# Altium PCB ESP32_Projet.PcbDoc (part 2 of 2)
Units mm, origin at the board's own origin, x right, y up, seen from the top; angles counter-clockwise.
Board outline 70 x 50 mm, 4 copper layers (Top Layer 1, GND, VCC, Bottom Layer 1), stack 1.573 mm thick; 93 components, 75 nets, 367 pads, 172 vias.
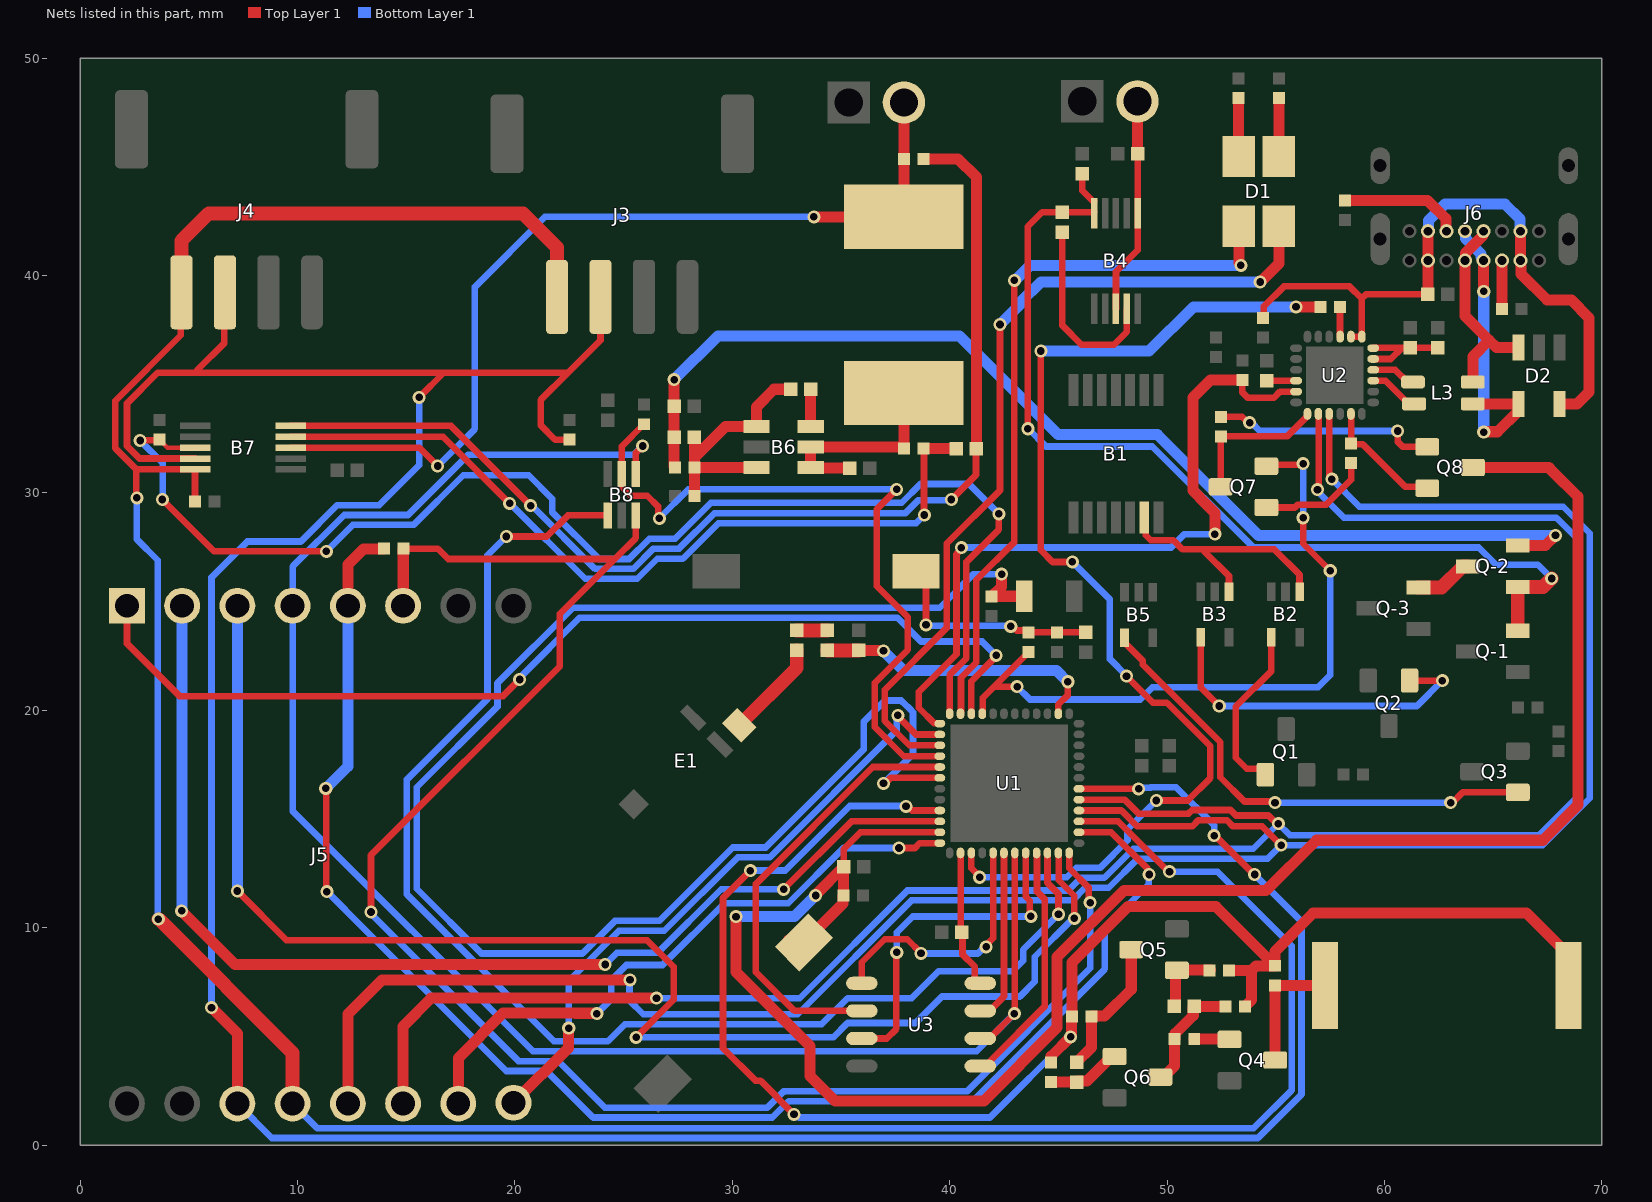
[diagram p4: the nets of this part, all layers, seen from the top]

## Via types
v1: diameter 0.6, hole 0.35, Top Layer 1 to Bottom Layer 1, 143 vias
v2: diameter 0.5, hole 0.2, Top Layer 1 to Bottom Layer 1, 29 vias

## Nets (pads, with @x,y where several pads share a name; then routed paths per layer and width w, separated by ;. In a path a pad name is that pad's centre, name@x,y a point inside that pad or via, vN(x,y) a via of type N, cw(c..) or ccw(c..) an arc to the next point about the centre after c; other vN are vias at no path point) (continued)
NetB1_6: B1.6 B2.1 B3.1 | length 11.9
  Top Layer 1 w0.305: B1.6@48.95,28.863 49.023,28.79 49.023,28.05 49.25,27.823 50.292,27.823 50.716,27.399 51.758,27.399 ; B3.1@52.847,25.459 52.847,26.172 51.689,27.33 51.758,27.399 ; B2.1@56.098,25.459 56.09,25.468 56.09,26.24 54.93,27.399 51.758,27.399
NetB2_4: B2.4 Q1.1 | length 7.9
  Top Layer 1 w0.305: Q1.1@54.524,17.035 54.524,17.062 54.276,17.309 53.666,17.309 53.162,17.814 53.162,20.168 54.798,21.804 B2.4@54.798,23.359
NetB3_4: B3.4 Q2.1 | length 15.8
  Top Layer 1 w0.305: B3.4@51.547,23.359 51.547,21.046 v1(52.4,20.193) ; Q2.1@61.157,21.37 61.174,21.353 62.653,21.353 v1(62.662,21.361)
  Bottom Layer 1 w0.305: v1(52.4,20.193) 61.493,20.193 v1(62.662,21.361)
NetB4_1: B4.1 B4.8 C2.1 J1.2 | length 10
  Top Layer 1 w0.305: B4.8@47.65,38.465 47.65,40.167 48.65,41.167 B4.1@48.65,42.865 48.648,42.868 48.648,45.589 C2.1@48.642,45.594
  Top Layer 1 w0.508: J1.2@48.641,48.006 J1.2@48.641,48.006 C2.1@48.642,45.594
NetB4_5: B4.5 C1.1 L1.2 Q-1.2 Q-2.1 | length 44.8
  Top Layer 1 w0.305: v1(43.594,32.948) 43.594,42.247 44.252,42.906 L1.2@45.187,42.906 45.996,42.906 46.648,42.906 B4.5@46.65,42.903 ; C1.1@46.101,44.676 46.101,43.909 46.597,43.413 B4.5@46.648,43.413
  Top Layer 1 w0.635: Q-1.2@66.132,23.658 Q-2.1@66.132,25.669 67.3,25.669 v1(67.691,26.06)
  Bottom Layer 1 w0.305: v1(43.594,32.948) 43.617,32.948 44.432,32.133 49.319,32.133 53.969,27.483 64.338,27.483 65.126,26.695 67.056,26.695 v1(67.691,26.06)
NetB4_9: B4.9 L1.1 | length 8.9
  Top Layer 1 w0.305: L1.1@45.187,41.986 45.187,37.694 46.076,36.805 47.549,36.805 48.148,37.404 48.148,38.463 B4.9@48.15,38.465
NetB5_4: B5.4 Q3.1 | length 22.6
  Top Layer 1 w0.305: B5.4@48.042,23.334 48.042,23.109 48.887,22.264 48.887,22.094 52.449,18.533 52.449,16.919 53.563,15.804 54.909,15.804 v1(54.966,15.748) ; v1(63.043,15.748) 63.123,15.748 63.595,16.22 Q3.1@66.133,16.22
  Bottom Layer 1 w0.305: v1(54.966,15.748) v1(63.043,15.748)
NetB6_1: B6.1 B6.3 C5.1 L2.1 R7.2 R9.1 | length 11.8
  Top Layer 1 w0.508: L2.1@28.245,32.563 28.254,32.554 28.254,31.621 ; R9.1@28.263,29.845 R7.2@28.263,31.166 ; B6.3@31.11,31.156 31.104,31.161 28.268,31.161 R7.2@28.263,31.166 ; C5.1@32.687,34.773 32.639,34.773 32.631,34.765 31.92,34.765 31.11,33.954 B6.1@31.11,33.056 29.698,33.056 28.263,31.621 R7.2@28.263,31.166
NetB6_4: B6.4 B6.5 C4.1 R6.1 X1.2 | length 9.6
  Top Layer 1 w0.508: C4.1@35.405,31.14 35.397,31.148 33.617,31.148 B6.4@33.61,31.156 B6.5@33.61,32.106 37.828,32.106 R6.1@37.904,32.029 37.904,34.59 X1.2@37.897,34.597
NetB6_6: B6.6 C5.2 | length 1.7
  Top Layer 1 w0.508: C5.2@33.607,34.773 33.608,34.771 33.608,33.057 B6.6@33.61,33.056
NetB7_3: B7.3 R23.2 U1.12 | length 60.9
  Top Layer 1 w0.203: R23.2@3.659,32.441 3.831,32.27 3.833,32.27 4.025,32.077 B7.3@5.297,32.077
  Top Layer 1 w0.305: v1(2.761,32.406) 2.78,32.424 3.639,32.424 R23.2@3.658,32.443 ; v1(3.785,29.693) 6.172,27.305 v1(11.328,27.305) ; U1.12@39.998,19.837 39.998,21.617 40.769,22.388 40.769,26.825 42.266,28.321 v1(42.266,29.032)
  Bottom Layer 1 w0.305: v1(2.761,32.406) 3.81,31.357 3.81,29.718 v1(3.785,29.693) ; v1(11.328,27.305) 12.548,28.524 15.342,28.524 17.628,30.81 20.639,30.81 21.717,29.732 21.717,29.12 23.88,26.957 25.255,26.957 26.187,27.889 27.365,27.889 29.016,29.54 37.795,29.54 38.659,30.404 40.894,30.404 v1(42.266,29.032)
NetB7_4: B7.4 J3.3 J4.3 J5.14 R21.2 U1.42 | length 151.7
  Top Layer 1 w0.305: B7.4@5.297,31.577 2.738,31.577 2.159,32.156 2.159,34.112 3.571,35.524 5.497,35.524 ; J4.3@6.668,39.224 6.638,39.194 6.638,36.889 5.385,35.636 5.497,35.524 ; v1(15.596,34.392) 16.728,35.524 ; R21.2@22.504,32.443 21.855,32.443 21.184,33.114 21.184,34.265 22.443,35.524 ; J3.3@23.94,39.014 23.94,37.021 22.443,35.524 ; U1.42@45.948,16.387 45.95,16.385 48.69,16.385 v1(48.692,16.383) ; v1(52.163,14.233) 52.205,14.233 53.992,12.446 v1(54.026,12.446) ; 5.497,35.524 16.728,35.524 ; 16.728,35.524 22.443,35.524
  Top Layer 1 w0.508: v1(6.045,6.325) 7.239,5.131 J5.14@7.239,1.905
  Bottom Layer 1 w0.305: v1(6.045,6.325) 6.045,26.111 7.696,27.762 10.16,27.762 11.832,29.434 13.762,29.434 15.596,31.267 v1(15.596,34.392) ; J5.14@7.239,1.905 8.821,0.323 54.179,0.323 56.185,2.329 56.185,10.287 v1(54.026,12.446) ; v1(48.692,16.383) 48.748,16.439 49.243,16.439 49.255,16.452 50.426,16.452 52.163,14.715 v1(52.163,14.233)
NetB7_5: B7.5 J3.4 J4.4 J5.13 R22.2 U1.39 | length 135.2
  Top Layer 1 w0.305: v1(2.616,29.769) 2.595,29.79 2.595,31.077 ; J4.4@4.668,39.224 4.631,39.187 4.631,37.245 1.626,34.239 1.626,32.047 2.595,31.077 ; R22.2@5.29,29.591 5.29,31.075 B7.5@5.293,31.077 ; B7.5@5.297,31.077 B7.5@5.293,31.077 ; U1.39@45.948,14.887 47.758,14.887 50.072,12.573 v1(50.114,12.573) ; 2.595,31.077 B7.5@5.293,31.077
  Top Layer 1 w0.635: v1(3.607,10.389) 3.632,10.389 9.779,4.242 J5.13@9.779,1.905 ; J4.4@4.668,39.224 4.668,41.6 5.918,42.85 20.381,42.85 21.94,41.29 J3.4@21.94,39.014
  Bottom Layer 1 w0.305: v1(2.616,29.769) 2.616,27.858 3.572,26.903 3.572,10.424 v1(3.607,10.389) ; J5.13@9.779,1.905 10.906,0.778 53.991,0.778 55.73,2.517 55.73,9.167 52.324,12.573 v1(50.114,12.573)
NetB7_8: B7.8 J2.2 R5.1 X1.1 | length 42.4
  Top Layer 1 w0.305: B7.8@9.697,32.077 15.61,32.077 v1(16.452,31.235)
  Top Layer 1 w0.508: v1(33.757,42.697) X1.1@37.897,42.697 37.904,42.705 R5.1@37.904,45.364 37.9,45.368 37.9,47.952 J2.2@37.897,47.955 J2.2@37.888,47.946
  Bottom Layer 1 w0.305: v1(16.452,31.235) 18.161,32.944 18.161,39.472 21.387,42.697 v1(33.757,42.697)
NetB7_9: B7.9 C3.2 R6.2 | length 37.6
  Top Layer 1 w0.305: B7.9@9.697,32.577 16.699,32.577 v1(19.761,29.515) ; R6.2@38.804,32.029 38.82,32.013 38.82,28.998 v1(38.837,28.981)
  Top Layer 1 w0.508: R6.2@38.804,32.029 C3.2@40.307,32.029
  Bottom Layer 1 w0.305: v1(19.761,29.515) 19.773,29.515 23.241,26.047 25.632,26.047 26.552,26.968 27.73,26.968 29.362,28.6 38.456,28.6 v1(38.837,28.981)
NetB7_10: B7.10 C3.1 R5.2 | length 52.5
  Top Layer 1 w0.305: B7.10@9.697,33.077 17.062,33.077 v1(20.726,29.413) ; v1(40.081,29.693) 41.213,30.824 41.213,32.015 C3.1@41.227,32.029
  Top Layer 1 w0.508: R5.2@38.804,45.364 40.386,45.364 41.227,44.523 C3.1@41.227,32.029
  Bottom Layer 1 w0.305: v1(20.726,29.413) 20.781,29.413 23.692,26.502 25.443,26.502 26.376,27.434 27.553,27.434 29.174,29.055 37.953,29.055 38.565,29.667 40.056,29.667 v1(40.081,29.693)
NetB8_1: B8.1 U1.34 | length 61.9
  Top Layer 1 w0.305: v1(19.609,27.991) 21.469,27.991 22.439,28.961 B8.1@24.267,28.961 ; U1.34@44.498,13.437 44.498,12.059 45.009,11.549 v1(45.009,10.617)
  Bottom Layer 1 w0.305: v1(19.609,27.991) 18.745,27.127 18.745,20.523 15.037,16.815 15.037,11.532 21.796,4.773 24.28,4.773 25.063,5.555 34.105,5.555 35.306,6.756 38.252,6.756 39.497,8.001 42.901,8.001 43.383,8.484 43.383,8.992 v1(45.009,10.617)
NetB8_3: B8.3 J5.6 R26.1 U1.36 | length 81
  Top Layer 1 w0.305: v1(13.386,10.719) 13.386,13.335 22.073,22.022 22.073,24.435 24.594,26.957 ; R26.1@14.868,27.423 R26.1@14.877,27.432 16.459,27.432 16.935,26.957 24.594,26.957 ; B8.3@25.567,28.961 25.567,27.93 24.594,26.957 ; U1.36@45.498,13.437 45.498,12.73 46.402,11.826 46.402,11.205 v1(46.459,11.148)
  Top Layer 1 w0.508: J5.6@14.859,24.805 14.868,24.814 R26.1@14.868,27.423
  Bottom Layer 1 w0.305: v1(13.386,10.719) 13.386,10.639 20.162,3.863 21.994,3.863 24.137,1.72 31.616,1.72 32.36,2.464 32.398,2.464 32.404,2.47 40.799,2.47 46.459,8.13 v1(46.459,11.148)
NetB8_4: B8.4 J5.4 U1.31 U3.6 | length 79
  Top Layer 1 w0.305: B8.4@25.567,30.861 25.567,31.841 v1(25.883,32.156) ; U3.6@41.409,4.902 41.834,4.902 42.998,6.066 U1.31@42.998,13.437
  Bottom Layer 1 w0.305: v1(25.883,32.156) 25.483,31.757 17.863,31.757 15.085,28.979 12.15,28.979 9.779,26.608 J5.4@9.779,24.805 9.779,15.367 20.828,4.318 41.25,4.318 v1@42.955,6.024
  other v1: 42.977,6.045
NetB8_5: B8.5 R24.1 U1.16 | length 33.4
  Top Layer 1 w0.305: R24.1@25.933,33.154 24.917,32.138 B8.5@24.917,30.861 24.965,30.813 24.965,30.236 25.337,29.863 26.094,29.863 26.588,29.369 26.588,28.885 v1(26.645,28.829) ; v1(37.562,30.159) 36.652,29.249 36.652,25.705 38.075,24.282 38.075,22.776 36.56,21.261 36.56,19.218 37.891,17.887 U1.16@39.548,17.887
  Bottom Layer 1 w0.305: v1(26.645,28.829) 27.975,30.159 v1(37.562,30.159)
NetB9_1: B9.1 R25.2 U1.18 | length 75.4
  Top Layer 1 w0.305: v1(36.957,16.637) 37.037,16.637 37.287,16.887 U1.18@39.548,16.887 ; B9.1@43.387,25.298 B9.1@43.438,25.248
  Top Layer 1 w0.508: v1(42.393,26.264) 42.375,26.246 42.375,25.68 R25.2@41.935,25.24 41.939,25.244 43.434,25.244 B9.1@43.438,25.248
  Bottom Layer 1 w0.305: v1(36.957,16.637) 38.312,17.992 38.312,19.905 38.22,19.997 38.22,20.011 37.867,20.364 37.853,20.364 37.77,20.447 37.033,20.447 36.043,19.456 36.043,18.195 31.536,13.688 30.023,13.688 26.645,10.31 24.602,10.31 23.106,8.814 18.466,8.814 15.492,11.788 15.492,16.459 19.2,20.168 19.2,21.246 22.668,24.714 39.548,24.714 41.097,26.264 v1(42.393,26.264)
NetBOOT1_2: BOOT1.2 C12.1 Q8.3 R11.1 U1.23 | length 87.5
  Top Layer 1 w0.305: C12.1@35.125,12.802 35.125,13.612 35.901,14.387 U1.23@39.548,14.387
  Top Layer 1 w0.508: v1(30.175,10.505) 30.173,10.502 30.173,7.953 33.576,4.549 33.576,3.177 34.722,2.032 41.58,2.032 44.947,5.399 44.947,8.641 48.015,11.709 54.559,11.709 56.871,14.021 67.285,14.021 68.91,15.646 68.91,29.82 67.716,31.014 67.564,31.166 Q8.3@64.067,31.166 ; BOOT1.2@32.586,9.421 BOOT1.2@32.698,9.421 ; BOOT1.2@33.297,9.32 35.089,11.111 35.089,11.46 R11.1@35.11,11.481 35.118,11.488 35.118,12.794 C12.1@35.125,12.802 33.85,11.527 33.85,11.498 v1(33.833,11.481)
  Bottom Layer 1 w0.508: v1(30.175,10.505) 32.857,10.505 v1(33.833,11.481)
NetC6_1: C6.1 L2.2 Q-2.2 R7.1 | length 51.2
  Top Layer 1 w0.508: v1(27.33,35.204) 27.329,35.203 27.329,33.987 C6.1@27.328,33.985 27.326,33.984 27.326,32.564 L2.2@27.325,32.563 27.325,31.204 R7.1@27.363,31.166 ; Q-2.2@66.132,27.569 67.396,27.569 v1(67.869,28.042)
  Bottom Layer 1 w0.508: v1(27.33,35.204) 29.337,37.211 40.462,37.211 44.983,32.69 49.549,32.69 54.197,28.042 v1(67.869,28.042)
NetC7_1: C7.1 E1.3 | length 4.5
  Top Layer 1 w0.635: E1.3@30.324,19.308 32.971,21.954 C7.1@32.971,22.751
NetC7_2: C7.2 C8.1 | length 1.4
  Top Layer 1 w0.508: C7.2@32.971,23.671 C7.2@32.972,23.673 ; C8.1@34.366,23.673 C8.1@34.368,23.674
  Top Layer 1 w0.635: C7.2@32.971,23.671 34.365,23.671 C8.1@34.368,23.674
NetC8_2: C8.2 C9.2 U1.2 | length 13.3
  Top Layer 1 w0.305: U1.2@44.998,19.837 44.998,20.259 45.441,20.701 v1(45.441,21.311)
  Top Layer 1 w0.508: C9.2@35.815,22.751 35.825,22.742 36.948,22.742 v1(36.957,22.733)
  Top Layer 1 w0.635: C8.2@34.368,22.754 35.813,22.754 C9.2@35.815,22.751
  Bottom Layer 1 w0.508: v1(36.957,22.733) 37.871,21.819 44.908,21.819 45.416,21.311 v1(45.441,21.311)
NetC13_1: C13.1 R10.1 R12.1 RESET1.2 | length 10.1
  Top Layer 1 w0.305: RESET1.2@38.453,26.391 38.913,25.931 v1(38.913,23.927) ; v1(42.81,23.862) 42.89,23.862 43.084,23.669 43.551,23.669 R12.1@43.637,23.582 R10.1@44.933,23.582 44.938,23.587 46.248,23.587 C13.1@46.253,23.592
  Bottom Layer 1 w0.305: v1(38.913,23.927) 38.945,23.894 42.778,23.894 v1(42.81,23.862)
NetC14_1: C14.1 Q5.3 R13.1 | length 6.6
  Top Layer 1 w0.508: C14.1@45.847,3.813 46.526,4.491 R13.1@46.526,5.918 46.536,5.928 47.127,5.928 48.353,7.154 Q5.3@48.353,8.992
NetC14_2: C14.2 Q6.1 R14.1 | length 3.4
  Top Layer 1 w0.508: R14.1@44.653,2.903 44.658,2.898 45.842,2.898 C14.2@45.847,2.893 45.903,2.949 46.316,2.949 47.441,4.074 Q6.1@47.591,4.074 ; Q6.1@47.583,4.082 Q6.1@47.591,4.074 ; Q6.1@47.587,4.078 Q6.1@47.591,4.074
NetC15_1: C15.1 Q5.1 R15.1 | length 3.3
  Top Layer 1 w0.508: C15.1@50.341,6.377 C15.1@50.34,6.375 50.396,6.431 50.396,7.985 Q5.1@50.453,8.042 51.96,8.042 51.976,8.026 R15.1@51.996,8.047
NetC15_2: C15.2 Q6.3 R16.1 R20.1 | length 5.4
  Top Layer 1 w0.508: Q6.3@49.691,3.124 49.841,3.124 50.35,3.633 R20.1@50.35,4.877 50.371,4.898 50.371,5.119 51.204,5.952 51.204,6.319 C15.2@51.26,6.375 R16.1@52.687,6.375
NetC18_1: C18.1 C19.1 U2.5 U2.6 | length 4.5
  Top Layer 1 w0.305: U2.5@59.484,36.158 60.291,36.158 60.8,36.666 ; U2.6@59.484,36.658 59.492,36.666 60.8,36.666 ; C19.1@62.459,36.675 C18.1@61.189,36.675 61.18,36.666 60.8,36.666
NetC21_1: C21.1 U2.16 | length 1.4
  Top Layer 1 w0.305: C21.1@54.585,35.151 54.588,35.154 55.93,35.154 U2.16@55.934,35.158
NetC?_1: C22.1 U1.26 U3.8 | length 6.4
  Top Layer 1 w0.305: U1.26@40.494,13.433 U1.26@40.498,13.437 40.507,13.428 40.507,9.864 40.592,9.779 40.592,8.768 41.16,8.199 41.16,7.579 41.297,7.442 U3.8@41.409,7.442
NetD1_1: D1.1 U1.11 | length 33.5
  Top Layer 1 w0.305: U1.11@40.498,19.837 40.498,19.924 40.521,19.947 40.521,21.496 41.224,22.2 41.224,25.984 42.977,27.737 v1(42.977,39.776)
  Top Layer 1 w0.508: D1.1@53.293,42.266 53.304,42.255 53.304,40.574 53.391,40.487 v1(53.391,40.462)
  Bottom Layer 1 w0.508: v1(42.977,39.776) 43.002,39.776 43.687,40.462 v1(53.391,40.462)
NetD1_2: D1.2 R19.2 | length 2.7
  Top Layer 1 w0.508: D1.2@53.289,45.47 R19.2@53.289,48.166
NetD1_3: D1.3 U1.15 | length 39.2
  Top Layer 1 w0.305: U1.15@39.548,18.387 38.14,18.387 37.015,19.512 37.015,20.938 39.86,23.783 39.86,27.656 42.316,30.113 v1(42.316,37.744)
  Top Layer 1 w0.508: v1(54.28,39.7) 54.302,39.7 55.156,40.554 D1.3@55.156,42.253
  Bottom Layer 1 w0.508: v1(42.316,37.744) 43.265,38.693 43.265,38.769 44.196,39.7 v1(54.28,39.7)
NetD1_4: D1.4 R17.2 | length 2.7
  Top Layer 1 w0.508: D1.4@55.143,45.466 R17.2@55.143,48.166
NetD2_3: D2.3 J6.A7 J6.B7 L3.2 | length 9.5
  Top Layer 1 w0.508: L3.2@64.063,35.095 64.063,36.271 64.81,37.019 ; J6.B7@64.555,41.999 64.528,41.971 64.528,41.829 63.732,41.033 63.732,40.714 J6.A7@63.705,40.687 63.705,38.124 64.81,37.019 ; D2.3@66.157,36.682 65.146,36.682 64.81,37.019
NetD2_4: D2.4 J6.A6 J6.B6 L3.3 | length 14
  Top Layer 1 w0.508: L3.3@64.063,34.095 64.069,34.089 66.151,34.089 D2.4@66.157,34.082 66.157,33.757 65.209,32.809 64.584,32.809 v1(64.567,32.791) ; J6.A6@64.555,40.687 64.561,40.681 64.561,39.274 v1(64.567,39.268)
  Bottom Layer 1 w0.508: J6.B6@63.705,42.037 63.732,42.01 63.732,41.691 64.434,40.989 64.434,40.846 64.555,40.725 J6.A6@64.555,40.687 ; v1(64.567,32.791) v1(64.567,39.268)
NetJ5_1: J5.1 U1.10 | length 48.1
  Top Layer 1 w0.305: J5.1@2.159,24.805 2.159,23.063 4.572,20.65 19.456,20.65 v1(20.218,21.412) ; U1.10@40.998,19.837 40.998,21.33 42.137,22.469 v1(42.137,22.523)
  Bottom Layer 1 w0.305: v1(20.218,21.412) 20.218,21.488 22.989,24.259 37.59,24.259 38.684,23.165 41.495,23.165 v1(42.137,22.523)
NetJ5_2: J5.2 U1.22 | length 52.7
  Top Layer 1 w0.305: v1(32.365,11.765) 35.487,14.887 U1.22@39.548,14.887
  Top Layer 1 w0.508: v1(4.674,10.77) 7.137,8.306 v1(24.155,8.306)
  Bottom Layer 1 w0.305: v1(24.155,8.306) 24.689,8.839 26.568,8.839 29.494,11.765 v1(32.365,11.765)
  Bottom Layer 1 w0.508: v1(4.674,10.77) 4.686,10.782 4.686,24.792 J5.2@4.699,24.805
NetJ5_3: J5.3 U1.35 | length 65
  Top Layer 1 w0.305: v1(7.239,11.684) 9.5,9.423 26.086,9.423 27.305,8.204 27.305,6.68 v1(25.578,4.953) ; U1.35@44.998,13.437 44.998,13.35 45.021,13.327 45.021,12.18 45.735,11.466 v1(45.735,10.425)
  Bottom Layer 1 w0.305: v1(25.578,4.953) 34.646,4.953 35.306,5.613 38.43,5.613 39.649,6.833 43.231,6.833 43.917,7.518 43.917,8.661 45.68,10.425 v1(45.735,10.425)
  Bottom Layer 1 w0.508: v1(7.239,11.684) J5.3@7.239,24.805
NetJ5_5: J5.5 R26.2 U1.38 | length 69.7
  Top Layer 1 w0.305: v1(11.303,16.408) 11.328,16.383 11.328,11.684 v1(11.354,11.659) ; U1.38@45.948,14.387 47.425,14.387 49.118,12.694 49.118,12.502 v1(49.174,12.446)
  Top Layer 1 w0.508: J5.5@12.319,24.805 12.319,26.695 13.035,27.411 13.956,27.411 R26.2@13.977,27.432
  Bottom Layer 1 w0.305: v1(11.354,11.659) 13.074,9.939 19.604,3.408 21.458,3.408 23.601,1.265 31.843,1.265 32.593,2.015 41.055,2.015 47.142,8.103 47.142,9.982 49.16,11.999 49.16,12.431 v1(49.174,12.446)
  Bottom Layer 1 w0.508: v1(11.303,16.408) 12.319,17.424 J5.5@12.319,24.805
NetJ5_9: J5.9 U1.14 | length 29.5
  Top Layer 1 w0.305: v1(37.617,19.761) 37.617,19.719 38.449,18.887 U1.14@39.548,18.887
  Top Layer 1 w0.508: J5.9@19.939,1.945 19.939,1.95 22.461,4.473 22.461,5.358 v1(22.479,5.375)
  Bottom Layer 1 w0.305: v1(22.479,5.375) 22.479,7.544 24.79,9.855 26.873,9.855 30.251,13.233 31.725,13.233 37.561,19.07 37.561,19.705 v1(37.617,19.761)
NetJ5_10: J5.10 U1.24 | length 28.9
  Top Layer 1 w0.305: v1(37.668,13.665) 38.405,13.665 38.627,13.887 U1.24@39.548,13.887
  Top Layer 1 w0.508: J5.10@17.399,1.905 17.399,4.013 19.465,6.079 22.771,6.079 22.787,6.063 23.757,6.063 v1(23.774,6.045)
  Bottom Layer 1 w0.305: v1(23.774,6.045) 24.44,6.711 24.44,7.588 25.132,8.28 26.797,8.28 29.642,11.125 32.577,11.125 35.117,13.665 v1(37.668,13.665)
NetJ5_11: J5.11 U1.41 U2.20 | length 100.5
  Top Layer 1 w0.305: U1.41@45.948,15.887 48.045,15.887 48.685,15.247 50.993,15.247 51.159,15.413 52.921,15.413 53.173,15.161 54.66,15.161 55.038,14.783 v1(55.118,14.783) ; v1(56.921,30.15) 56.977,30.205 56.977,33.482 56.967,33.492 56.967,33.605 U2.20@56.977,33.614
  Top Layer 1 w0.508: J5.11@14.859,1.905 14.859,5.461 16.154,6.756 v1(26.518,6.756)
  Bottom Layer 1 w0.305: v1(26.518,6.756) 33.105,6.756 38.058,11.709 45.458,11.709 46.042,12.294 47.117,12.294 48.454,13.63 53.965,13.63 v1(55.118,14.783) 55.654,14.247 67.096,14.247 68.989,16.14 68.989,27.774 67.908,28.854 58.141,28.854 56.921,30.074 v1(56.921,30.15)
NetJ5_12: J5.12 U1.40 U2.21 | length 105.6
  Top Layer 1 w0.305: U1.40@45.948,15.387 47.902,15.387 48.63,14.658 51.158,14.658 51.447,14.947 52.744,14.947 53.033,14.658 54.379,14.658 v1(55.245,13.792) ; U2.21@57.457,33.631 57.457,30.835 57.579,30.712 v1(57.579,30.632)
  Top Layer 1 w0.508: J5.12@12.319,1.905 12.319,6.02 13.894,7.595 v1(25.298,7.595)
  Bottom Layer 1 w0.305: v1(25.298,7.595) 25.273,7.569 25.273,6.655 25.908,6.02 33.012,6.02 38.244,11.252 45.644,11.252 46.228,11.836 47.32,11.836 48.659,13.175 54.628,13.175 v1(55.245,13.792) 67.285,13.792 69.444,15.951 69.444,28.143 68.224,29.362 58.849,29.362 v1(57.579,30.632)
NetJ6_A5: J6.A5 R30.1 | length 2.2
  Top Layer 1 w0.508: J6.A5@65.405,40.687 65.409,40.683 65.409,38.459 R30.1@65.412,38.456
NetJ6_B5: J6.B5 R29.1 | length 5.6
  Top Layer 1 w0.508: R29.1@58.191,43.452 61.983,43.452 62.828,42.608 62.828,42.064 J6.B5@62.855,42.037
NetL3_1: L3.1 U2.4 | length 2.1
  Top Layer 1 w0.305: U2.4@59.484,35.658 60.5,35.658 61.063,35.095 L3.1@61.313,35.095
NetL3_4: L3.4 U2.3 | length 2.3
  Top Layer 1 w0.305: U2.3@59.484,35.158 60.05,35.158 61.113,34.095 L3.4@61.363,34.095
NetLS1_N: LS1.N Q4.3 R18.1 | length 5.7
  Top Layer 1 w0.508: Q4.3@54.974,3.912 54.97,3.916 54.97,7.344 R18.1@54.966,7.348 57.258,7.348 LS1.N@57.265,7.341
NetLS1_P: LS1.P R13.2 R14.2 R15.2 R16.2 R18.2 U1.21 | length 75.2
  Top Layer 1 w0.305: v1(30.833,12.626) 29.573,11.366 29.573,4.456 31.066,2.963 31.292,2.963 v1(32.842,1.413) ; v1(37.993,15.581) 38.073,15.581 38.267,15.387 U1.21@39.548,15.387
  Top Layer 1 w0.508: R14.2@44.653,3.803 44.674,3.824 44.674,4.085 v1(45.568,4.978) 45.568,5.003 45.605,5.04 45.605,5.897 R13.2@45.626,5.918 45.626,8.389 48.209,10.973 52.241,10.973 R18.2@54.966,8.248 ; R15.2@52.85,8.026 53.88,8.026 ; R16.2@53.587,6.375 53.88,6.669 53.88,8.026 ; LS1.P@68.465,7.341 68.465,8.741 66.538,10.668 56.725,10.668 54.966,8.908 R18.2@54.966,8.248 ; 53.88,8.026 53.887,8.026 54.088,8.227 54.945,8.227 R18.2@54.966,8.248
  Bottom Layer 1 w0.305: v1(30.833,12.626) 32.438,12.626 35.408,15.596 37.978,15.596 v1(37.993,15.581) ; v1(32.842,1.413) 32.922,1.413 33.07,1.265 41.854,1.265 v1(45.568,4.978)
NetQ4_1: Q4.1 R20.2 | length 1.6
  Top Layer 1 w0.508: R20.2@51.25,4.877 51.258,4.869 52.867,4.869 Q4.1@52.874,4.862
NetQ7_1: Q7.1 R31.2 | length 5.2
  Top Layer 1 w0.305: Q7.1@54.568,29.327 55.881,29.327 56.011,29.457 57.321,29.457 58.471,30.607 R31.2@58.471,31.376
NetQ7_2: Q7.2 R12.2 U1.9 | length 31.9
  Top Layer 1 w0.305: U1.9@41.498,19.837 41.498,19.924 41.521,19.947 41.521,20.566 42.037,21.082 ; v1(43.104,21.082) 42.037,21.082 ; R12.2@43.637,22.682 42.037,21.082 ; Q7.2@54.568,31.227 54.628,31.287 56.205,31.287 v1(56.261,31.344) ; v1(56.261,28.854) 56.261,27.661 v1(57.506,26.416)
  Bottom Layer 1 w0.305: v1(43.104,21.082) 43.692,20.494 48.764,20.494 49.327,21.057 56.947,21.057 57.506,21.615 v1(57.506,26.416) ; v1(56.261,28.854) v1(56.261,31.344)
NetQ7_3: Q7.3 R32.1 U2.19 | length 6.8
  Top Layer 1 w0.305: Q7.3@52.468,30.277 52.472,30.281 52.472,32.591 R32.1@52.476,32.595 55.522,32.595 56.459,33.533 U2.19@56.459,33.633 U2.19@56.461,33.63
NetQ8_1: Q8.1 R32.2 | length 10.3
  Top Layer 1 w0.305: R32.2@52.476,33.495 52.595,33.495 52.599,33.499 53.449,33.499 53.717,33.23 v1(53.797,33.23) ; v1(60.604,32.842) 60.604,32.36 60.848,32.116 Q8.1@61.967,32.116
  Bottom Layer 1 w0.305: v1(53.797,33.23) 53.877,33.23 54.265,32.842 v1(60.604,32.842)
NetQ8_2: Q8.2 R31.1 U2.23 | length 5.7
  Top Layer 1 w0.305: U2.23@58.459,33.633 58.465,33.627 58.465,32.282 58.519,32.228 59.009,32.228 60.961,30.276 61.907,30.276 Q8.2@61.967,30.216
"NetQ -2_3": Q-2.3 Q-3.2 | length 2.7
  Top Layer 1 w0.635: Q-3.2@61.56,25.639 62.626,25.639 63.599,26.612 63.824,26.612 Q-2.3@63.832,26.619
NetR27_1: R27.1 U1.27 | length 51.6
  Top Layer 1 w0.305: U1.27@40.998,13.437 40.998,12.73 41.377,12.351 v1(41.377,12.319) ; v1(44.196,36.525) 44.196,27.356 44.734,26.818 45.639,26.818 v1(45.644,26.822) ; v1(48.133,21.565) 49.352,20.345 49.993,20.345 51.994,18.344 51.994,16.891 50.952,15.85 v1(49.505,15.85)
  Top Layer 1 w0.508: v1(55.931,38.557) R27.1@57.056,38.557
  Bottom Layer 1 w0.305: v1(41.377,12.319) 45.39,12.319 45.822,12.751 46.914,12.751 48.181,14.018 48.181,14.526 v1(49.505,15.85) ; v1(45.644,26.822) 47.371,25.095 47.371,22.352 48.133,21.59 v1(48.133,21.565)
  Bottom Layer 1 w0.508: v1(44.196,36.525) 49.174,36.525 51.206,38.557 v1(55.931,38.557)
NetR27_2: R27.2 U2.9 | length 1.4
  Top Layer 1 w0.305: R27.2@57.956,38.557 57.957,38.556 57.957,37.184 U2.9@57.959,37.183
NetR28_1: R28.1 U1.13 U2.17 | length 33.9
  Top Layer 1 w0.305: U1.13@39.548,19.387 39.54,19.396 39.304,19.396 38.583,20.117 38.583,20.844 40.315,22.576 40.315,27.179 40.538,27.403 v1(40.538,27.483) ; R28.1@53.467,35.186 53.455,35.174 53.455,34.633 53.721,34.366 54.91,34.366 55.202,34.658 U2.17@55.934,34.658 U2.17@55.927,34.664
  Top Layer 1 w0.508: v1(52.2,28.1) 52.2,29.082 51.514,29.768 51.514,29.786 51.2,30.1 51.2,34.385 52.001,35.186 R28.1@53.467,35.186
  Bottom Layer 1 w0.305: v1(40.538,27.483) 50.187,27.483 50.804,28.1 v1(52.2,28.1)
NetU1_17: U1.17 U3.2 | length 20.4
  Top Layer 1 w0.305: U3.2@35.959,6.172 32.868,6.172 31.09,7.95 31.09,12.014 36.462,17.387 U1.17@39.548,17.387
NetU1_29: U1.29 U3.1 | length 12
  Top Layer 1 w0.305: U3.1@35.959,7.442 35.959,8.411 37.015,9.467 38.051,9.467 38.684,8.834 v1(38.684,8.814) ; v1(41.681,9.119) 41.681,9.198 41.998,9.515 U1.29@41.998,13.437
  Bottom Layer 1 w0.305: v1(38.684,8.814) 41.297,8.814 41.602,9.119 v1(41.681,9.119)
NetU1_30: U1.30 U3.7 | length 8
  Top Layer 1 w0.305: U3.7@41.409,6.172 41.834,6.172 42.498,6.836 U1.30@42.498,13.437
NetU1_32: U1.32 U3.3 | length 15.7
  Top Layer 1 w0.305: U3.3@35.959,4.902 37.109,4.902 37.551,5.344 37.551,8.849 v1(37.567,8.865) ; U1.32@43.498,13.437 43.498,11.425 43.682,11.241 43.682,10.572 v1(43.739,10.516)
  Bottom Layer 1 w0.305: v1(37.567,8.865) 37.567,9.779 38.303,10.516 v1(43.739,10.516)
NetU1_33: U1.33 U3.5 | length 11.4
  Top Layer 1 w0.305: U3.5@41.409,3.632 41.754,3.632 41.891,3.769 41.891,3.892 44.367,6.368 44.367,11.31 44.021,11.656 44.021,13.327 43.998,13.35 U1.33@43.998,13.437
VBUS: C20.1 D2.5 J6.A4 J6.A9 J6.B4 J6.B9 R1.1 U2.7 U2.8 | length 30.8
  Top Layer 1 w0.305: R1.1@54.407,38.042 54.455,38.091 54.455,38.58 55.372,39.497 58.395,39.497 58.959,38.933 ; U2.8@58.459,37.183 U2.7@58.959,37.183 58.959,38.933 ; C20.1@62.002,39.145 C20.1@61.999,39.141 59.167,39.141 58.959,38.933
  Top Layer 1 w0.508: C20.1@62.002,39.145 62.002,40.684 J6.A9@62.005,40.687 J6.B4@62.005,42.037 ; J6.B9@66.255,42.037 J6.A4@66.255,40.687 66.282,40.66 66.282,40.068 67.488,38.862 68.605,38.862 69.418,38.049 69.418,34.646 68.859,34.087 D2.5@68.059,34.087
  Bottom Layer 1 w0.508: J6.B4@62.005,42.037 62.032,42.064 62.032,42.525 62.789,43.282 65.532,43.282 66.228,42.586 66.228,42.064 J6.B9@66.255,42.037
pads on no net: B1.8 B1.9 B1.10 B1.11 B1.12 B1.13 D2.1 E1.1 E1.4 J3.MP1 J3.MP2 J4.MP1 J4.MP2 J5.15 J6.A8 J6.B8 U1.5 U1.6 U1.7 U1.8 U1.20 U1.25 U1.28 U1.44 U1.45 U1.47 U1.48 U2.1 U2.10 U2.11 U2.12 U2.13 U2.14 U2.15 U2.18 U2.22 U2.24 U2.25
copper on no net:
  other v2: 57.159,34.858 58.259,34.858 57.159,35.958 58.259,35.958

## Polygon pours and split planes (outlines as drawn)
GND on GND "NONET_L-01_P-001" (solid, pour order 0): 0.381,49.632 69.698,49.632 69.698,0.381 69.672,0.33 0.381,0.33
3V3 on VCC "NONET_L-01_P-001" (solid, pour order 1): 0.254,49.784 69.723,49.784 69.723,0.254 69.672,0.356 0.279,0.356
GND on Top Layer 1 "NONET_L-01_P-001" (solid, pour order 2): 0.254,49.784 69.85,49.784 69.85,0.254 0.254,0.279
GND on Bottom Layer 1 "NONET_L-01_P-001" (solid, pour order 3): 0.254,49.784 69.85,49.784 69.85,0.254 0.229,0.203

## Other copper
Top Layer 1:
  pour cut-out: 23.012,15.138 25.121,13.132 27.66,12.93 32.916,18.186 32.916,20.267 30.429,22.754 27.991,22.754 23.012,18.39
GND:
  pour cut-out: 23.042,15.162 25.119,13.153 27.656,12.95 32.897,18.191 32.897,20.231 30.408,22.72 28.022,22.72 23.042,18.381
VCC:
  pour cut-out: 23.038,15.14 25.083,13.17 27.661,12.954 32.906,18.161 32.906,20.231 30.404,22.733 28.016,22.733 23.038,18.385
Bottom Layer 1:
  pour cut-out: 23.035,15.145 25.105,13.075 27.683,12.935 32.941,18.193 32.941,20.2 30.426,22.714 28.013,22.714 23.035,18.371

## Silkscreen, mask and mechanical layers (free items; w line width, h text height)
Mechanical 1:
  the board outline again, w0.254

## Dimensions
0,0 to 70,0 on Top Overlay
0,0 to 0,50 on Top Overlay

## Text inside footprints (layer, text, board x,y; h text height)
J6: Mechanical 13 "PCB EDGE" at 59.304,46.444 h0.81 r180
LS1: Top Overlay "+" at 70.465,6.641 h1.27 r180; Top Overlay "-" at 55.265,6.641 h1.27 r180; Mechanical 13 "+" at 70.465,6.641 h1.27 r180; Mechanical 13 "-" at 55.265,6.641 h1.27 r180
Q1: Mechanical 9 "SOT-23" at 54.057,17.835 h0.5
Q2: Mechanical 9 "SOT-23" at 61.623,20.57 h0.5 r180
Q3: Mechanical 9 "SOT-23" at 65.333,15.754 h0.5 r90
Q4: Mechanical 9 "SOT-23" at 53.674,5.328 h0.5 r270
Q5: Mechanical 9 "SOT-23" at 49.653,7.575 h0.5 r90
Q6: Mechanical 9 "SOT-23" at 48.391,4.54 h0.5 r270
Q7: Mechanical 9 "SOT-23" at 53.768,28.861 h0.5 r90
Q8: Mechanical 9 "SOT-23" at 62.767,32.582 h0.5 r270